# Altium PCB Stepper.PcbDoc
Units mil, origin at the board's own origin, x right, y up, seen from the top; angles counter-clockwise.
Board outline 1800 x 1900 mil, 2 copper layers (Top, Bottom); 42 components, 36 nets, 141 pads, 123 vias.
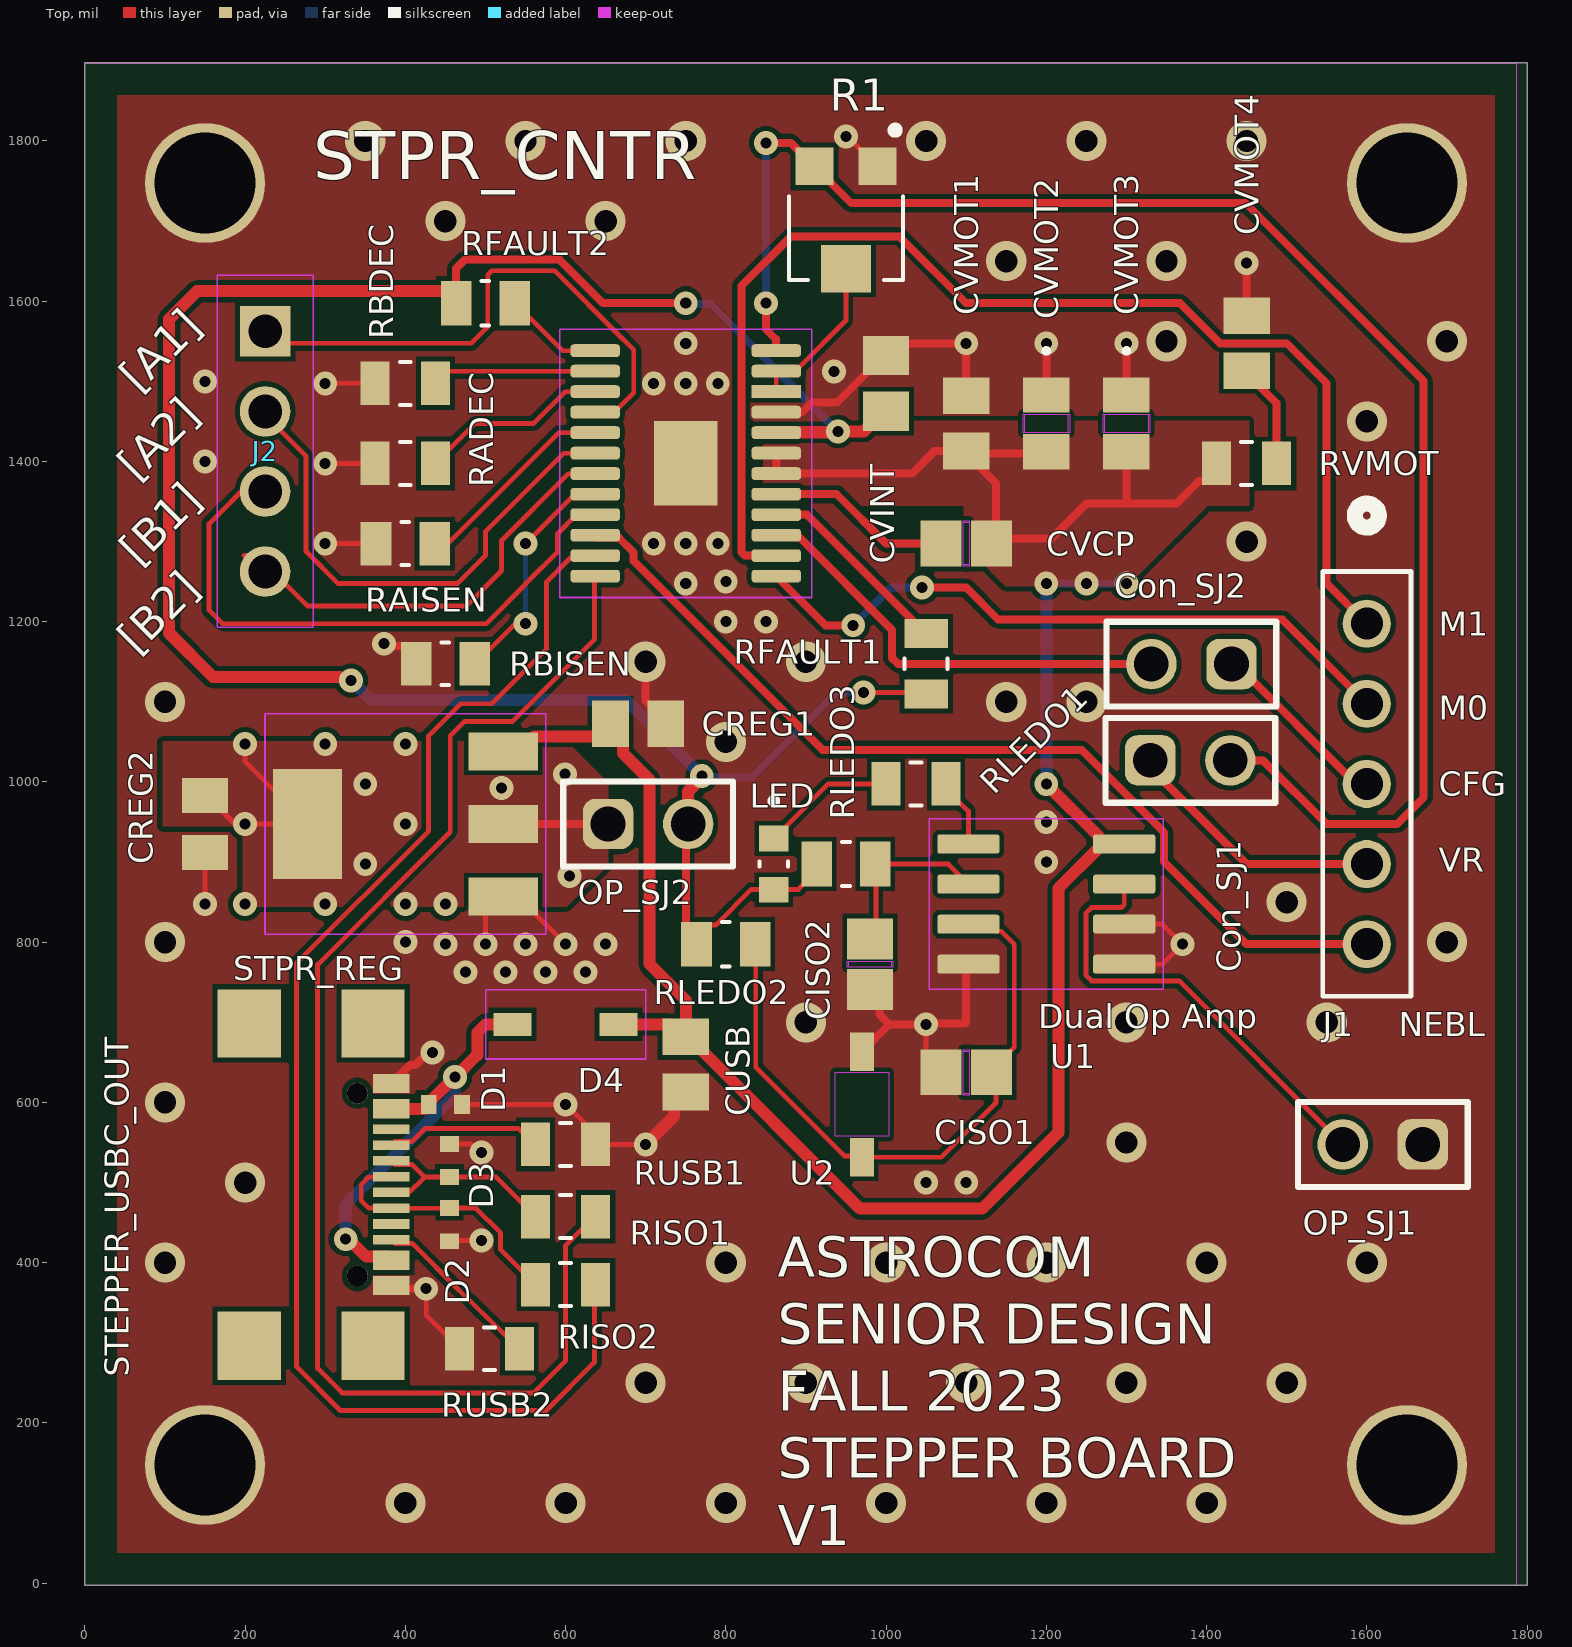
[diagram p0: Top view]
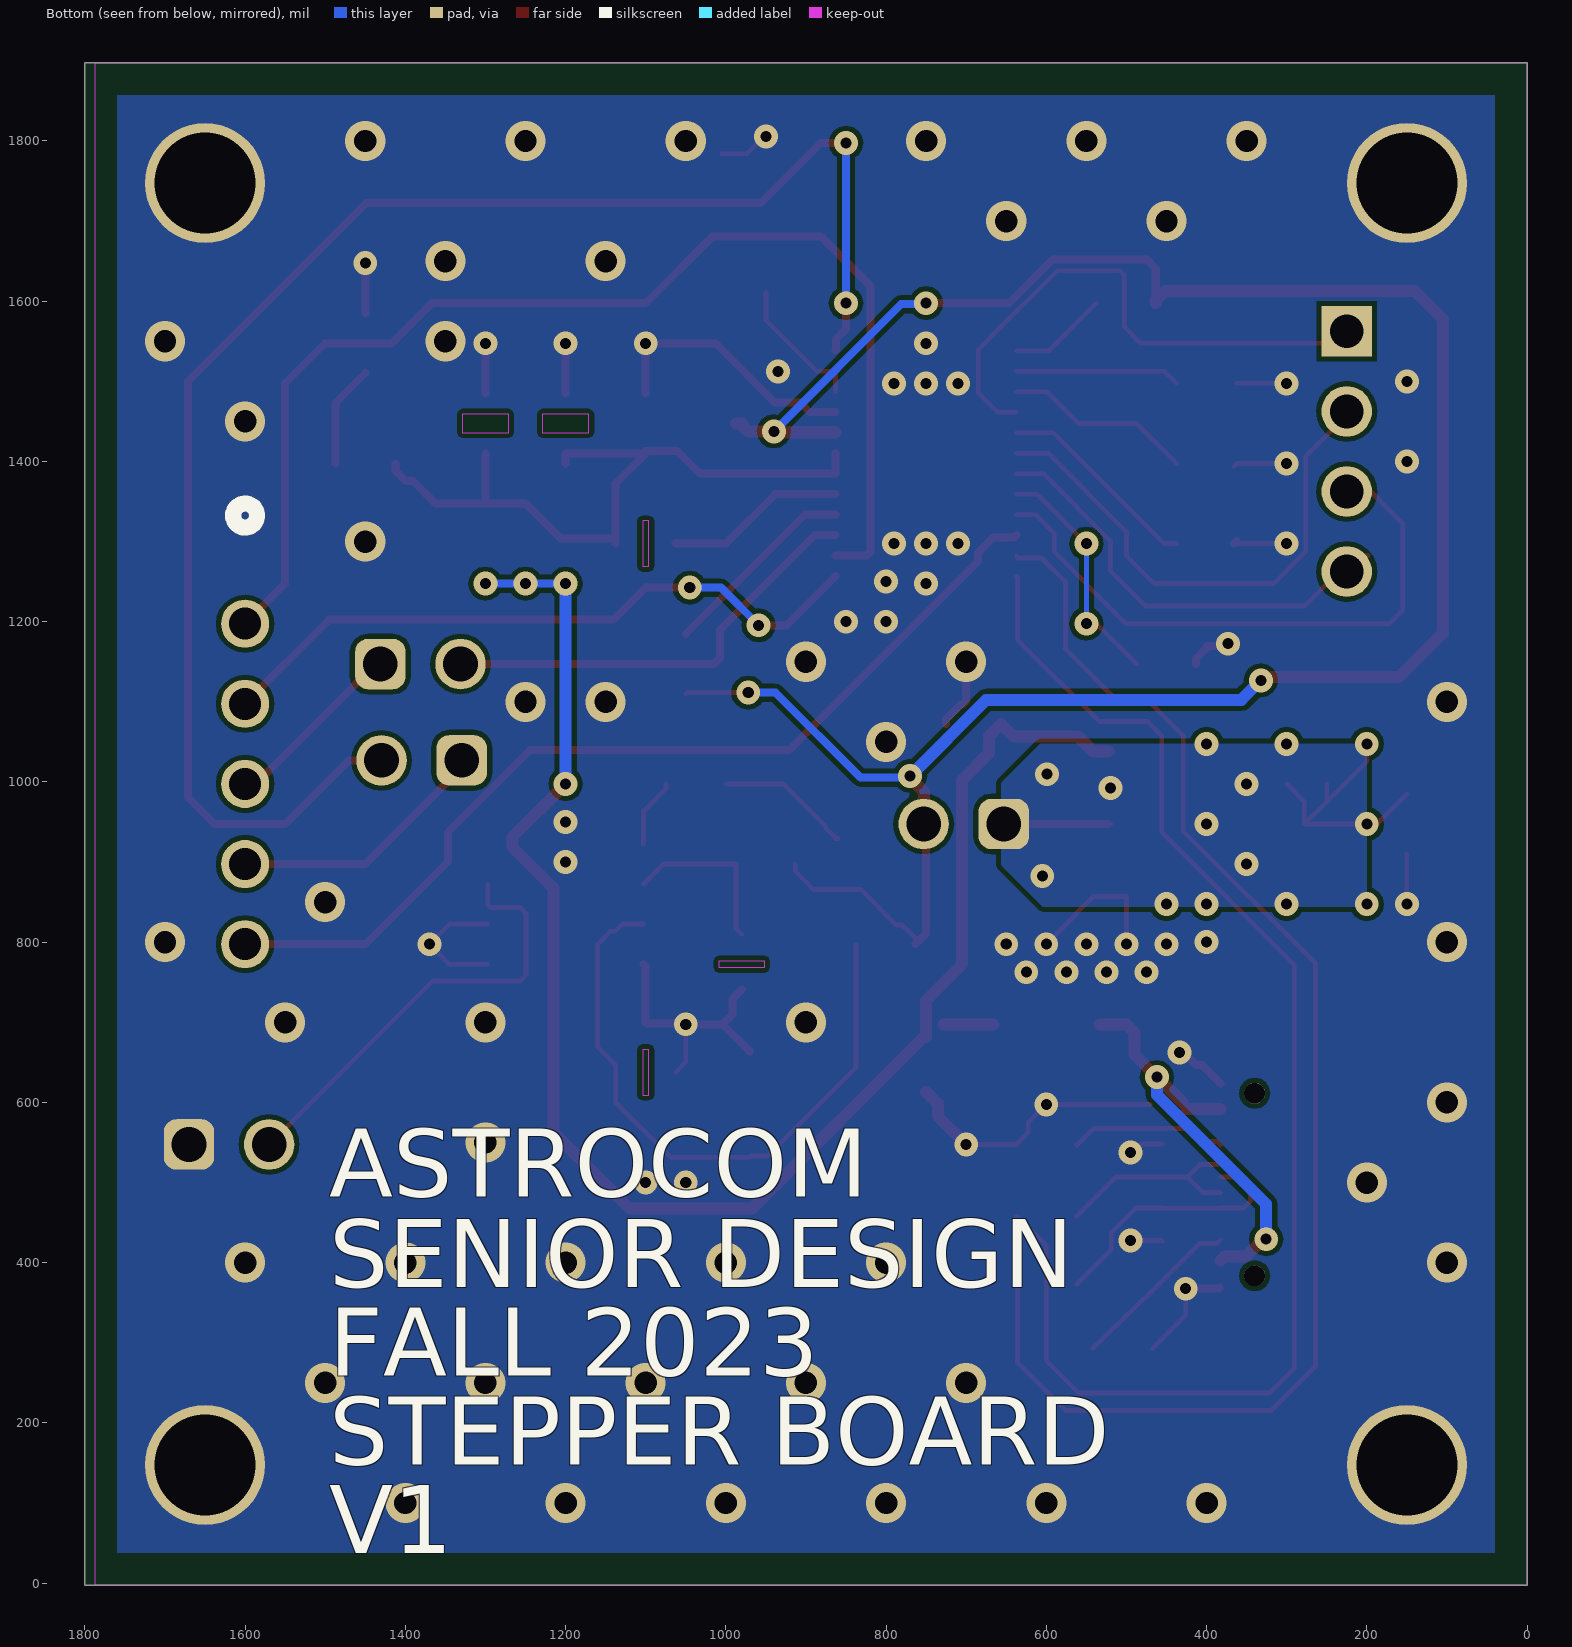
[diagram p1: Bottom view, seen from below]
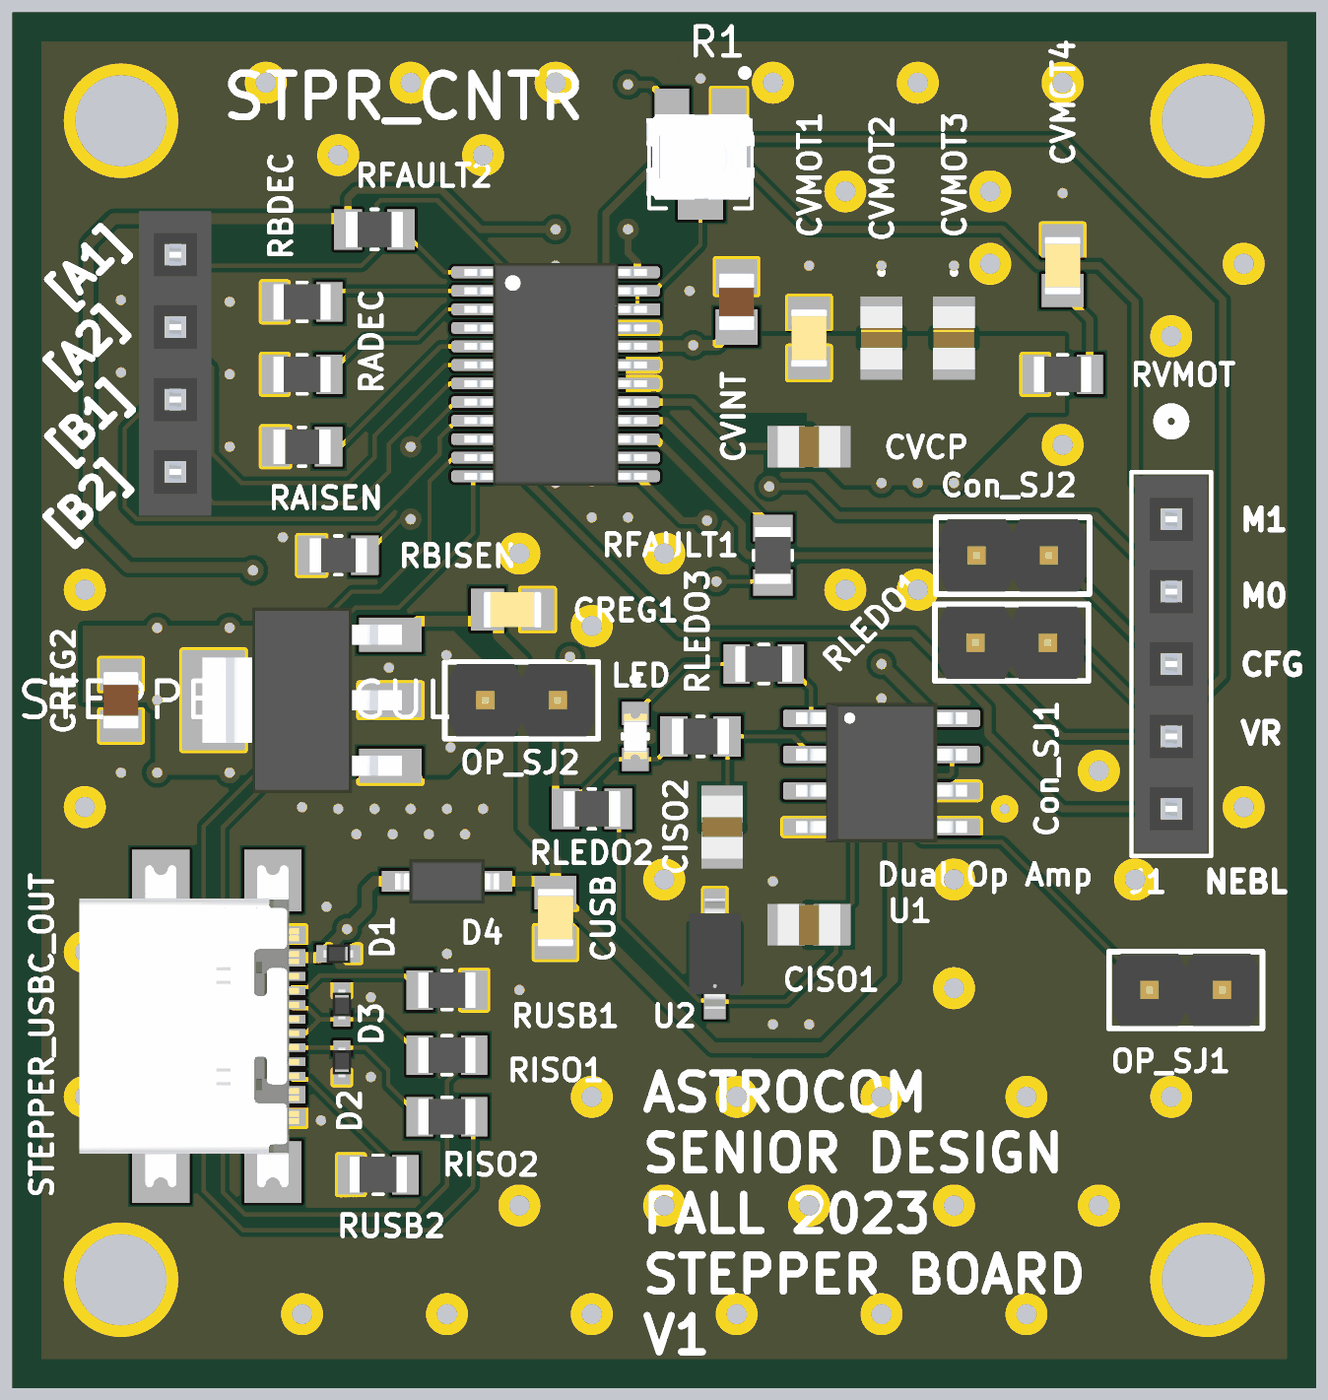
[diagram p2: 3D render of the assembled board from above, using the file's embedded part models]

## Layer stack, top to bottom
Top Solder: solder mask 0.4, Solder Resist, Dk 3.5
Top: signal copper 1.378
Dielectric 1: dielectric 12.6, FR-4, Dk 4.8
Bottom: signal copper 1.378
Bottom Solder: solder mask 0.4, Solder Resist, Dk 3.5

## Board outline
0,-2.5 1800,-2.5 1800,1897.5 0,1897.5

## Design rules (kind name [scope] priority, off if disabled: settings)
BoardOutlineClearance mdCopperDimension [All] p1: gap=10 ignorepadtopadclearanceinfootprint=FALSE except(0: Arc-SplitContinuation Track-SplitContinuation SMDPad-SplitContinuation THPad-SplitContinuation Via-SplitContinuation Fill-SplitContinuation Poly-SplitContinuation Region-SplitContinuation Text-SplitContinuation; 40: Poly-OutlineEdge Poly-CavityEdge Poly-CutoutEdge Poly-SplitBarrior)
Clearance "Clearance (Same Net)" [All] p1: gap=6 ignorepadtopadclearanceinfootprint=FALSE
Clearance [All] p2: gap=6 ignorepadtopadclearanceinfootprint=FALSE
HoleSize [All] p1: absolutevalues=TRUE maxlimit=100000 minlimit=13.78 maxpercent=80.000 minpercent=20.000
HoleToHoleClearance mdDrill [All] p1: gap=6 allowstackedmicrovias=TRUE
MinimumSolderMaskSliver [All] p1 off: minsoldermaskwidth=10
PasteMaskExpansion Expansion_SMDPaste_OFF [InPadClass('SMDPaste_OFF')] p1: expansion=0
PasteMaskExpansion mlMinCreamFrame [All] p2: expansion=0
PolygonConnect PolygonConnect_For_PolygonThermal_ON_Width60000_Gap100000 [InPolygonClass('PolygonThermal_ON_Width60000_Gap100000') vs Not IsVia] p1: connectstyle=Relief reliefconductorwidth=6 reliefentries=4 polygonreliefangle="90 Angle" airgapwidth=10
PolygonConnect PolygonConnect_For_PolygonThermal_OFF [InPolygonClass('PolygonThermal_OFF')] p2: connectstyle=Direct reliefconductorwidth=10 reliefentries=4 polygonreliefangle="90 Angle" airgapwidth=10
PolygonConnect ThermalVias [IsVia] p3: connectstyle=Direct reliefconductorwidth=10 reliefentries=4 polygonreliefangle="90 Angle" airgapwidth=10
PolygonConnect [All] p4: connectstyle=Direct reliefconductorwidth=10 reliefentries=4 polygonreliefangle="90 Angle" airgapwidth=10
RoutingVias [All] p1: holewidth=13.78 width=29.78 viastyle="Through Hole" minholewidth=13.78 minwidth=29.78 maxholewidth=100 maxwidth=100
SolderMaskExpansion Expansion_SMDSolder_OFF [InPadClass('SMDSolder_OFF')] p1: expansion=0 istentingtop=FALSE
SolderMaskExpansion mlMinStopFrame [All] p2: expansion=4 istentingtop=FALSE
Width [All] p1: maxlimit=30 minlimit=6 preferedwidth=10 minimp=50.000000 maximp=50.000000 favimp=50.000000
26 further rules are at their usual default settings.

## Classes and differential pairs
polygon class PolygonThermal_OFF: Polygon_1_Net_5VOUTUSB2
pad class SMDPaste_OFF: STEPPER_CONTROLLER-25

## Components (designator, comment, footprint, x,y, rotation, side; value= is the part's Value field where it differs from the comment)
CISO1 "0.01uF" CAPC220145_88N_KEM 1100,637.5 r180 top
CISO2 "0.01uF" CAPC220145_88N_KEM 980,772.5 r270 top
Con_SJ1 "61300211121" 61300211121 1379.73,1026.9 r0 top
Con_SJ2 "61300211121" 61300211121 1381.15,1147.15 r180 top
CREG1 "10uF" CAPC2012X88N 690.55,1072.5 r0 top
CREG2 "22uF" CAPC2012X145N 150,947.5 r270 top
CUSB "10uF" CAPC2012X88N 750,647.5 r270 top
CVCP "0.01uF" CAPC220145_88N_KEM 1100,1297.5 r180 top
CVINT "4.7uF" CAPC2012X140N 1000,1497.5 r90 top
CVMOT1 "10uF" CAPC2012X88N 1100,1447.5 r270 top
CVMOT2 "0.1uF" CAP_KGM21_KAV 1200,1447.5 r270 top
CVMOT3 "0.1uF" CAP_KGM21_KAV 1300,1447.5 r270 top
CVMOT4 "10uF" CAPC2012X88N 1450,1547.5 r270 top
D1 "Protection Diode CPDQ5V0" MBTB-D-SOD-923F-IMP-0402 450,597.5 r180 top
D2 "Protection Diode CPDQ5V0" MBTB-D-SOD-923F-IMP-0402 455,447.5 r90 top
D3 "Protection Diode CPDQ5V0" MBTB-D-SOD-923F-IMP-0402 455,527.5 r270 top
D4 "SCHOTTKY DIODE" SOD3715X145N 600,697.5 r180 top
J1 "5P Female Headers" CONN5_1LFBN-RC_SUL 1600,1197.5 r270 top
J2 "4P Female Headers" SULLINS_PPTC041LFBN-RC 225,1412.5 r270 top
LED "Green LED" LEDC1608X35N 860,897.5 r270 top
OP_SJ1 "61300211121" 61300211121 1620,547.5 r180 top
OP_SJ2 "61300211121" 61300211121 703,947.5 r0 top
R1 "10k Ohm Potentiometer" TRIM_TC33X-2-103E 950,1697.5 r270 top
RADEC "47k Ohm" RESC2012X60N#1 400,1397.5 r180 top (schematic designator RADECAY)
RAISEN "0.1 Ohm" RESC2012X60N#2 400,1297.5 r180 top
RBDEC "47k Ohm" RESC2012X60N#1 400,1497.5 r180 top (schematic designator RBDECAY)
RBISEN "0.1 Ohm" RESC2012X60N#2 450,1147.5 r180 top
RFAULT1 "1.5k Ohm" RESC2012X60N#1 1050,1147.5 r270 top
RFAULT2 "10k Ohm" RESC2012X55N 500,1597.5 r0 top
RISO1 "1.5k Ohm" RESC2012X60N#1 600,457.5 r180 top
RISO2 "1.5k Ohm" RESC2012X60N#1 600,372.5 r180 top
RLEDO1 "2.2k Ohm" RESC2012X60N#1 1037.4,997.5 r0 top (schematic designator RLEDOUT1)
RLEDO2 "10k Ohm" RESC2012X55N 800,797.5 r180 top (schematic designator RLEDOUT2)
RLEDO3 "10k Ohm" RESC2012X55N 950,897.5 r180 top (schematic designator RLEDOUT3)
RUSB1 "5.1k Ohm" RESC2012X60N#1 600,547.5 r0 top
RUSB2 "5.1k Ohm" RESC2012X60N#1 505,292.5 r180 top
RVMOT "1 Ohm" RESC2012X60N#1 1450,1397.5 r180 top
STEPPER_USBC_OUT "USBC Connector" USB4110-GF-A_GCT 250,497.5 r270 top
STPR_CNTR "MTR DVR" SOP65P640X120-25N 750,1397.5 r0 top (schematic designator STEPPER_CONTROLLER)
STPR_REG "DIODES AZ1117I" SOT230P700X185-4N 400,947.5 r180 top (schematic designator STEPPER_REGULATOR)
U1 "Dual Op Amp" SOIC127P599X175-8N 1200,847.5 r0 top
U2 "Zenner Diode" SOD-123_ONS 970,597.5 r90 top

## Footprints (in the part's own frame and the unit in brackets; to place one, negate y for a bottom-side part, rotate by r counter-clockwise, add the part's x,y. Pads: shape width x height; smd on the part's side, far side on the other; paste and mask are expansions set on the pad)
61300211121 [mm] "Pin Header, pitch 2.54 mm, THT, Vertical, single row, 2p"
  rrect50% 1.6x1.6 hole 1.1: 1(-1.27,0)
  round 1.6 hole 1.1: 2(1.27,0)
  silkscreen extent -2.69,-1.35 2.69,1.35, body extent -2.54,-1.27 2.54,1.27, height 8.57
CAP_KGM21_KAV [mil]
  rect 44x58 smd paste+0 mask+0: 1(-35.5,0) 2(35.5,0)
  Top keep-out region: -11.5,-27 -11.5,27 11.5,27 11.5,-27
  Keep-Out Layer region: -11.5,-29 -11.5,29 11.5,29 11.5,-29
  silkscreen extent -93,-3 -88,3, body extent -44,-29 44,29, height 37
CAPC2012X88N [mm]
  rect 1.16x1.47 smd: 1(-0.875,0) 2(0.875,0)
  body extent -1.02,-0.64 1.02,0.64, height 1.4
CAPC2012X140N [mm] "C0805"
  rect 1.24x1.47 smd: 1(-0.885,0) 2(0.885,0)
  body extent -1,-0.63 1,0.63, height 1.4
CAPC2012X145N [mm]
  rect 1.11x1.47 smd: 1(-0.9,0) 2(0.9,0)
  body extent -1,-0.63 1,0.63, height 1.45
CAPC220145_88N_KEM [mm]
  rect 1.306x1.45 smd paste+0 mask+0: 1(-0.803,0) 2(0.803,0)
  Top keep-out region: -0.099,-0.674 -0.099,0.674 0.099,0.674 0.099,-0.674
  Keep-Out Layer region: -0.099,-0.725 -0.099,0.725 0.099,0.725 0.099,-0.725
  body extent -1.1,-0.72 1.1,0.72, height 0.88
CONN5_1LFBN-RC_SUL [mil]
  round 60 hole 40 paste-99999 mask+0: 1(0,0) 2(100,0) 3(200,0) 4(300,0) 5(400,0)
  silkscreen extent -150,-55 465,55, body extent -60,-50 460,50, height 335
LEDC1608X35N [mm]
  rect 0.81x0.93 smd: A(0.81,0) C(-0.81,0)
  silkscreen extent -2.1,-0.45 0.09,0.45, body extent -0.8,-0.4 0.8,0.4, height 0.8
MBTB-D-SOD-923F-IMP-0402 [mm]
  rect 0.5x0.6 smd: 1(-0.525,0) 2(0.525,0)
  body extent -0.52,-0.33 0.52,0.33, height 0.82
RESC2012X55N [mm]
  rect 0.97x1.42 smd: 1(-0.93,0) 2(0.93,0)
  silkscreen extent -0.12,-0.7 0.12,0.7, body extent -1,-0.63 1,0.63, height 0.55
RESC2012X60N#1 [mm]
  rect 0.92x1.38 smd: 1(-0.955,0) 2(0.955,0)
  silkscreen extent -0.17,-0.68 0.17,0.68, body extent -1,-0.63 1,0.63, height 0.6
RESC2012X60N#2 [mm]
  rect 0.97x1.38 smd: 1(-0.93,0) 2(0.93,0)
  silkscreen extent -0.12,-0.68 0.12,0.68, body extent -1,-0.6 1,0.6, height 0.6
SOD3715X145N [mm]
  rect 1.21x0.73 smd: A(1.68,0) C(-1.68,0)
  Top keep-out lines w0.05: 2.535,1.1 2.535,-1.1 -2.535,-1.1 -2.535,1.1 2.535,1.1
  body extent -1.83,-0.77 1.83,0.77, height 1.51
SOD-123_ONS [mil]
  rect 48x30 smd: 1(-66,0) 2(66,0)
  Top keep-out region: -40,33.5 40,33.5 40,-33.5 -40,-33.5
  body extent -76,-36 76,36, height 53
SOIC127P599X175-8N [mil]
  rrect25% 77.56x23.62 smd: 1(-97.24,75) 2(-97.24,25) 3(-97.24,-25) 4(-97.24,-75) 5(97.24,-75) 6(97.24,-25) 7(97.24,25) 8(97.24,75)
  Top keep-out lines w1.97: -145.87,-106.4 145.87,-106.4 145.87,106.4 -145.87,106.4 -145.87,-106.4
  body extent -118,-96 118,96, height 69
SOP65P640X120-25N [mil]
  rrect54% 61.81x16.14 smd: 1(-112.99,140.75) 2(-112.99,115.16) 3(-112.99,89.57) 4(-112.99,63.98) 5(-112.99,38.39) 6(-112.99,12.8) 7(-112.99,-12.8) 8(-112.99,-38.39) 9(-112.99,-63.98) 10(-112.99,-89.57) 11(-112.99,-115.16) 12(-112.99,-140.75) 13(112.99,-140.75) 14(112.99,-115.16) 15(112.99,-89.57) 16(112.99,-63.98) 17(112.99,-38.39) 18(112.99,-12.8) 19(112.99,12.8) 20(112.99,38.39) 21(112.99,63.98) 23(112.99,115.16) 24(112.99,140.75)
  rect 61.81x16.14 smd: 22(112.99,89.57)
  rect 79.72x105.51 smd paste+0: 25(0,0)
  Top keep-out lines w1.97: -157.48,-167.32 157.48,-167.32 157.48,167.32 -157.48,167.32 -157.48,-167.32
  body extent -126,-154 126,154, height 47
SOT230P700X185-4N [mil]
  rect 86.61x47.24 smd: 1(-122.05,90.55) 2(-122.05,0) 3(-122.05,-90.55)
  rect 86.61x137.8 smd: 4(122.05,0)
  Top keep-out lines w1.97: 175.2,137.8 -175.2,137.8 -175.2,-137.8 175.2,-137.8 175.2,137.8
  body extent -138,-128 138,128, height 65
SULLINS_PPTC041LFBN-RC [mil]
  rect 63.2x63.2 / inner round 58.38 / far side rect 63.2x63.2 hole 42.13: 1(-150,0)
  round 63.2 hole 42.13: 2(-50,0) 3(50,0) 4(150,0)
  Top keep-out lines w1.97: 219.69,-59.84 -219.69,-59.84 -219.69,59.84 219.69,59.84 219.69,-59.84
  body extent -210,-50 210,50, height 335
TRIM_TC33X-2-103E [mm]
  rect 1.2x1.2 smd: 1(-1.8,1) 3(-1.8,-1)
  rect 1.5x1.6 smd: 2(1.45,0)
  silkscreen extent -3.07,-1.8 1.8,1.8, body extent -1.5,-1.9 1.5,1.9, height 1.1
USB4110-GF-A_GCT [mil]
  round 26 hole 26: 13(-114,90) 14(114,90)
  rect 85x79 smd: 15(-201.18,109.76) 16(201.18,109.76) 17(-201.18,-44.97) 18(201.18,-44.97)
  rect 24x45 smd: A1-B12(-125.98,132.39) A4-B9(-94.49,132.39) A9-B4(94.49,132.39) A12-B1(125.98,132.39)
  rect 12x45 smd: A5(-49.21,132.39) A6(-9.84,132.39) A7(9.84,132.39) A8(49.21,132.39) B5(68.9,132.39) B6(29.53,132.39) B7(-29.53,132.39) B8(-68.9,132.39)
  body extent -222,-157 222,146, height 128

## Part data
CISO1 CISO2 CVCP: library part C0805C103K1RAC7210, "CAP CER SMD 0805 .01UF 100V X7R", MFR_NAME=Kemet, COPYRIGHT="Copyright (C) 2023 Ultra Librarian. All rights reserved.", MANUFACTURER_PART_NUMBER=C0805C103K1RAC7210, RefDes=RefDes, TYPE=DEV
Con_SJ1 Con_SJ2 OP_SJ1 OP_SJ2: library part CMP-1712-00002-5, "CONN HEADER VERT 2POS 2.54MM", Color=Black, Contact Resistance=20mΩ, Current Rating=3A, Max Operating Temperature=125°C, Min Operating Temperature=-40°C, Operating Supply Voltage=250V, Connector Type="Male Pin", Contact Gender=Male, Contact Material=Copper, Contact Mating Length=5.9944mm, Contact Plating=Gold, Gender=Male, Height=8.94mm, Housing Material=PBT, Lead Free="Lead Free", Lead Pitch=2.54mm, Mount="Through Hole", NexarPartId=20081794, Number of Contacts=2, Number of Pins=2, Number of Positions=2, Number of Rows=1, Orientation=Vertical, Packaging=Bulk, Pitch=2.54mm, REACH SVHC="No SVHC", RoHS=Compliant, Termination="Through Hole", Voltage Rating=250V
CREG1 CUSB CVMOT1 CVMOT4: library part C0805C106J8RACAUTO, "CAP CER 10UF 10V X7R 0805", PACKAGE="0805 KEMET", AVAILABILITY=Unavailable, MF=KEMET, MP=C0805C106J8RACAUTO, PRICE=None, SNAPEDA_LINK=https://www.snapeda.com/parts/C0805C106J8RACAUTO/KEMET/view-part/3596814/?ref=snap
CREG2: library part GRM21BR61C226ME44L, "CAP CER 22UF 16V X5R 0805", PACKAGE="2012 Murata", Arrow_Electronics-Purchase-URL=https://snapeda.com/shop?store=Arrow+Electronics&id=4387753, Digi-Key_Part_Number=490-10747-1-ND, DigiKey-Purchase-URL=https://snapeda.com/shop?store=DigiKey&id=4387753, MF=Murata, Mouser-Purchase-URL=https://snapeda.com/shop?store=Mouser&id=4387753, MP=GRM21BR61C226ME44L, SNAPEDA_LINK=https://www.snapeda.com/parts/GRM21BR61C226ME44L/Murata/view-part/4387753/?ref=snap
CVINT: library part C0805C475M4RACAUTO, "CAP CER 4.7UF 16V X7R 0805", PACKAGE=None, AVAILABILITY=Unavailable, MP=C0805C475M4RACAUTO, PRICE=None
CVMOT2 CVMOT3: library part KGM21NR71H104JT, "CAP CER 0.1UF 50V X7R 0805", MFR_NAME="KYOCERA AVX", COPYRIGHT="Copyright (C) 2023 Ultra Librarian. All rights reserved.", MANUFACTURER_PART_NUMBER=KGM21NR71H104JT, RefDes=RefDes, TYPE=DEV
D1 D2 D3: library part CPDQ5V0-HF, "TVS DIODE 5VWM 18.6V 0402/SOD923", PACKAGE="0402 Comchip", AVAILABILITY="In Stock", CHECK_PRICES=https://www.snapeda.com/parts/CPDQ5V0-HF/Comchip+Technology/view-part/?ref=eda, DeviceSetName=CPDQ5V0-HF, GateName_1=G$1, LibraryName=CPDQ5V0-HF, MF="Comchip Technology", MP=CPDQ5V0-HF, PRICE=None, PURCHASE-URL="https://www.snapeda.com/api/url_track_click_mouser/?unipart_id=809934&manufacturer=Comchip Technology&part_name=CPDQ5V0-HF&search_term=cpdq5v0-hf", SNAPEDA_LINK=https://www.snapeda.com/parts/CPDQ5V0-HF/Comchip+Technology/view-part/?ref=snap, SymbolName_1=CPDQ5V0-HF
D4: library part 1N5819HW-7-F, "DIODE SCHOTTKY 40V 1A SOD123", PACKAGE="SOD-123 Fairchild Semiconductor", AVAILABILITY="In Stock", CHECK_PRICES=https://www.snapeda.com/parts/1N5819HW-7-F/Diodes+Inc./view-part/?ref=eda, DeviceSetName=1N5819HW-7-F, GateName_1=G$1, LibraryName=1N5819HW-7-F, MF="Diodes Inc.", MP=1N5819HW-7-F, PRICE=None, PURCHASE-URL="https://www.snapeda.com/api/url_track_click_mouser/?unipart_id=42272&manufacturer=Diodes Inc.&part_name=1N5819HW-7-F&search_term=1n5819hw-7-f", SNAPEDA_LINK=https://www.snapeda.com/parts/1N5819HW-7-F/Diodes+Inc./view-part/?ref=snap, SymbolName_1=1N5819HW-7-F
J1: library part PPTC051LFBN-RC, "CONN HDR 5POS 0.1 TIN PCB", MFR_NAME=Sullins, COPYRIGHT="Copyright (C) 2023 Ultra Librarian. All rights reserved.", MANUFACTURER_PART_NUMBER=PPTC051LFBN-RC, RefDes=RefDes, TYPE=DEV
J2: library part PPTC041LFBN-RC, "CONN HDR 4POS 0.1 TIN PCB", PACKAGE=SULLINS_PPTC041LFBN-RC, AVAILABILITY="In Stock", CHECK_PRICES=https://www.snapeda.com/parts/PPTC041LFBN-RC/Sullins+Connector+Solutions/view-part/?ref=eda, DeviceSetName=PPTC041LFBN-RC, GateName_1=G$1, LibraryName=PPTC041LFBN-RC, MF="Sullins Connector", MP=PPTC041LFBN-RC, PRICE=None, PURCHASE-URL="https://www.snapeda.com/api/url_track_click_mouser/?unipart_id=285917&manufacturer=Sullins Connector&part_name=PPTC041LFBN-RC&search_term=pptc041lfbn-rc", SNAPEDA_LINK=https://www.snapeda.com/parts/PPTC041LFBN-RC/Sullins+Connector+Solutions/view-part/?ref=snap, SymbolName_1=PPTC041LFBN-RC
LED: library part LTST-C190GKT, "LED GREEN CLEAR CHIP SMD", PACKAGE="0603 Lite-On", CHECK_PRICES=https://www.snapeda.com/parts/LTST-C190GKT/Lite-On+Inc./view-part/?ref=eda, MF="Lite-On Inc.", MP=LTST-C190GKT, SNAPEDA_LINK=https://www.snapeda.com/parts/LTST-C190GKT/Lite-On+Inc./view-part/?ref=snap
R1: library part TC33X-2-103E, "TRIMMER 10K OHM 0.1W J LEAD TOP", PACKAGE="SOD-23 Bourns", CHECK_PRICES=https://www.snapeda.com/parts/TC33X-2-103E/Bourns/view-part/47092/?ref=eda, Digi-Key_Part_Number=TC33X-103ECT-ND, MF=Bourns, MP=TC33X-2-103E, PURCHASE-URL=https://pricing.snapeda.com/search/part/TC33X-2-103E/?ref=eda, SNAPEDA_LINK=https://www.snapeda.com/parts/TC33X-2-103E/Bourns/view-part/47092/?ref=snap
RADEC RBDEC: library part RC0805FR-1047KL, "RES 47K OHM 1% 1/8W 0805", PACKAGE=None, AVAILABILITY=Unavailable, MP=RC0805FR-1047KL, PRICE=None
RAISEN RBISEN: library part CRM0805AFX-R100ELF, "RES 0.1 OHM 1% 1/4W 0805", PACKAGE=None, AVAILABILITY=Unavailable, MP=CRM0805AFX-R100ELF, PRICE=None
RFAULT1 RISO1 RISO2: library part AC0805JR-071K5L, "RES SMD 1.5K OHM 5% 1/8W 0805", PACKAGE=None, AVAILABILITY=Unavailable, MP=AC0805JR-071K5L, PRICE=None
RFAULT2 RLEDO2 RLEDO3: library part TNPW080510K0FEEA, "RES 10K OHM 1% 1/8W 0805", PACKAGE=None, AVAILABILITY=Unavailable, MP=TNPW080510K0FEEA, PRICE=None
RLEDO1: library part AC0805FR-072K2L, "RES SMD 2.2K OHM 1% 1/8W 0805", PACKAGE=None, AVAILABILITY=Unavailable, MP=AC0805FR-072K2L, PRICE=None
RUSB1 RUSB2: library part RC0805JR-075K1L, "RES 5.1K OHM 5% 1/8W 0805", PACKAGE=None, AVAILABILITY=Unavailable, MP=RC0805JR-075K1L, PRICE=None
RVMOT: library part RC0805JR-071RL, "RES 1 OHM 5% 1/8W 0805", PACKAGE="2012 Rohm Semiconductor", CHECK_PRICES=https://www.snapeda.com/parts/RC0805JR-071RL/Yageo/view-part/615240/?ref=eda, Digi-Key_Part_Number=311-1.0ARCT-ND, MF=Yageo, MP=RC0805JR-071RL, PURCHASE-URL=https://pricing.snapeda.com/search/part/RC0805JR-071RL/?ref=eda, SNAPEDA_LINK=https://www.snapeda.com/parts/RC0805JR-071RL/Yageo/view-part/615240/?ref=snap
STEPPER_USBC_OUT: library part USB4110-GF-A, "CONN RCP USB2.0 TYP C 24P SMD RA", MFR_NAME="Global Connector Technology", COPYRIGHT="Copyright (C) 2023 Ultra Librarian. All rights reserved.", DeviceSetName=USB4110-GF-A, GateName_1=A, LibraryName=USB4110-GF-A, MANUFACTURER_PART_NUMBER=USB4110-GF-A, SymbolName_1=USB4110-GF-A
STPR_CNTR: library part DRV8834PWP, "IC MOTOR DRIVER BIPOLAR 24HTSSOP", PACKAGE="HTSSOP-24 Texas Instruments", AVAILABILITY="In Stock", DeviceSetName=DRV8834PWP, GateName_1=G$1, LibraryName=DRV8834PWP, MF="Texas Instruments", MP=DRV8834PWP, PRICE=None, PURCHASE-URL=https://pricing.snapeda.com/search?q=DRV8834PWP&ref=eda, SymbolName_1=DRV8834PWP
STPR_REG: library part AZ1117IH-3.3TRG1, "IC REG LINEAR 3.3V 1A SOT223", PACKAGE="SOT-223 Diodes Inc.", AVAILABILITY="In Stock", CHECK_PRICES=https://www.snapeda.com/parts/AZ1117IH-3.3TRG1/Diodes+Inc./view-part/?ref=eda, DeviceSetName=AZ1117IH-3.3TRG1, GateName_1=G$1, LibraryName=AZ1117IH-3.3TRG1, MF="Diodes Inc.", MP=AZ1117IH-3.3TRG1, PRICE=None, PURCHASE-URL="https://www.snapeda.com/api/url_track_click_mouser/?unipart_id=490259&manufacturer=Diodes Inc.&part_name=AZ1117IH-3.3TRG1&search_term=az1117ih-3.3trg1", SNAPEDA_LINK=https://www.snapeda.com/parts/AZ1117IH-3.3TRG1/Diodes+Inc./view-part/?ref=snap, SymbolName_1=AZ1117IH-3.3TRG1
U1: library part LM358DR, "IC OPAMP GP 2 CIRCUIT 8SOIC", PACKAGE="SOIC-8 Texas Instruments", AVAILABILITY="In Stock", CHECK_PRICES=https://www.snapeda.com/parts/LM358DR/Texas+Instruments/view-part/?ref=eda, DeviceSetName=LM358DR, GateName_1=A, LibraryName=LM358DR, MF="Texas Instruments", MP=LM358DR, PRICE=None, PURCHASE-URL="https://www.snapeda.com/api/url_track_click_mouser/?unipart_id=6639&manufacturer=Texas Instruments&part_name=LM358DR&search_term=lm358dr", SNAPEDA_LINK=https://www.snapeda.com/parts/LM358DR/Texas+Instruments/view-part/?ref=snap, SymbolName_1=LM358DR
U2: library part MMSZ5225BT1G, "DIODE ZENER 3V 500MW SOD123", MFR_NAME=onsemi, COPYRIGHT="Copyright (C) 2023 Ultra Librarian. All rights reserved.", DeviceSetName=MMSZ5225BT1G, GateName_1=A, LibraryName=MMSZ5225BT1G, MANUFACTURER_PART_NUMBER=MMSZ5225BT1G, SymbolName_1=MMSZ5225BT1G

## Free pads (board coordinates)
  round 150 hole 126 unplated: MH1(1650,147.5) MH2(150,1747.5) MH3(1650,1747.5) MH4(150,147.5)

## Via types
v1: diameter 29.78/29.78 (per signal layer), hole 13.78, Top to Bottom, 77 vias
v2: diameter 50, hole 28, Top to Bottom, 46 vias

## Nets (pads, with @x,y where several pads share a name; then routed paths per layer and width w, separated by ;. In a path a pad name is that pad's centre, name@x,y a point inside that pad or via, vN(x,y) a via of type N, cw(c..) or ccw(c..) an arc to the next point about the centre after c; other vN are vias at no path point)
3.3VOUTUSB2: CVINT.1 LED.A OP_SJ2.2 RFAULT1.2 RFAULT2.1 RLEDO2.2 RLEDO3.2 STPR_CNTR.20 | length 3005.9
  Top w6: RLEDO2.2 763.39,805.29 779.48,821.39 787.27,821.39 831.79,865.91 890.65,865.91 913.39,888.64 RLEDO3.2 ; v1(972,1111.5) 1048.6,1111.5 RFAULT1.2@1050,1110.1
  Top w10: RFAULT2.1 463.39,1640.89 474.5,1652 592.21,1652 646.71,1597.5 v1(750,1597.5) ; OP_SJ2.2@752.85,945.35 750,942.5 750,810.89 RLEDO2.2 ; v1@770,1005.19 v1(770,1007.5)
  Top w15: v1(332.21,1126.82) 329.38,1129.65 319.72,1129.65 318.67,1130.7 160.15,1130.7 105,1185.84 105,1577.5 140,1612.5 451.79,1612.5 463.39,1600.91 RFAULT2.1 ; OP_SJ2.2@752.85,945.35 752.85,988.04 v1@770,1005.19 ; STPR_CNTR.20 863.56,1436.46 938.96,1436.46 v1(940,1437.5) 972.41,1437.5 978.56,1443.65 978.56,1445.75 980.32,1447.5 CVINT.1@987.4,1447.5
  Bottom w10: v1(750,1597.5) 751.24,1596.26 781.24,1596.26 v1(940,1437.5) ; v1(770,1007.5) 772.11,1005.39 832.1,1005.39 938.21,1111.5 v1(972,1111.5)
  Bottom w15: v1(332.21,1126.82) 356.53,1102.5 675,1102.5 v1(770,1007.5)
5VOUTUSB2: CREG1.1 CUSB.1 CVCP.1 CVMOT1.2 CVMOT2.2 CVMOT3.2 D4.C RVMOT.2 STPR_CNTR.18 STPR_CNTR.19 STPR_REG.3 U1.8 | length 2968
  Top w6: CVCP.1@1137.4,1297.5 CVCP.1@1143.7,1303.8
  Top w10: STPR_CNTR.19 STPR_CNTR.18 1032.2,1384.7 1060.55,1413.05 CVMOT1.2 ; CVCP.1@1137.4,1297.5 1137.4,1372.7 1100,1410.1 1200,1410.1 CVMOT2.2@1200,1397.5 ; CVCP.1@1143.7,1303.8 1206.3,1303.8 1250,1347.5 1300,1347.5 ; 1149,496.5 1150,497.5 ; CVMOT3.2@1300,1410.1 1300,1347.5 ; RVMOT.2 1412.4,1388.44 1399.29,1375.33 1390.24,1375.33 1362.4,1347.5 1300,1347.5
  Top w15: STPR_REG.3 541.73,1038.05 560.46,1056.77 640.77,1056.77 656.1,1072.11 CREG1.1 671.44,1057.17 671.44,1036.06 705,1002.5 705,772.5 750,727.5 CUSB.1 ; D4.C CUSB.1@728.56,697.5 ; CUSB.1@750,684.9 967.34,467.56 1019.99,467.56 1020.05,467.5 1120,467.5 1149,496.5 ; 1150,497.5 1215,562.5 1215,867.23 1266.36,918.59 1265.96,918.98 1265.96,931.54 v1(1200,997.5)
  Bottom w10: v1(1200,1247.5) v1(1250,1247.5) v1(1300,1247.5)
  Bottom w15: v1(1200,997.5) v1(1200,1247.5)
DN: D3.2 RISO1.2 STEPPER_USBC_OUT.A7 STEPPER_USBC_OUT.B7 | length 258.7
  Top w6: STEPPER_USBC_OUT.A7 404.96,487.66 424.13,506.83 ; STEPPER_USBC_OUT.B7 387.08,522.34 408.62,522.34 424.13,506.83 ; RISO1.2@562.6,457.5 513.27,506.83 D3.2 424.13,506.83
DP: D2.2 RISO2.2 STEPPER_USBC_OUT.A6 STEPPER_USBC_OUT.B6 | length 335.1
  Top w6: STEPPER_USBC_OUT.A6 381.95,506.9 354.4,506.9 345,497.5 345,477.5 354.4,468.1 382.26,468.1 STEPPER_USBC_OUT.B6 454.8,467.97 D2.2 488.12,468.17 518.89,437.4 518.89,416.21 RISO2.2@562.6,372.5
GND: CISO1.2 CISO2.2 CREG1.2 CREG2.2 CUSB.2 CVINT.2 CVMOT1.1 CVMOT2.1 CVMOT3.1 CVMOT4.1 D1.1 D2.1 D3.1 OP_SJ1.1 pad.MH1 pad.MH2 pad.MH3 pad.MH4 R1.1 RADEC.2 RAISEN.2 RBDEC.2 RBISEN.2 RUSB1.2 RUSB2.2 STEPPER_USBC_OUT.A1-B12 STEPPER_USBC_OUT.A12-B1 STPR_CNTR.21 STPR_CNTR.25 STPR_REG.1 U1.4 U1.5 U1.6 U2.2 | length 2317.5
  Top w6: v1(150,847.5) CREG2.2@150,910.1 ; v1(300,1297.5) RAISEN.2 RAISEN.2@366,1297.5 ; v1(300,1397.5) RADEC.2 362.6,1397.5 RADEC.2@366,1393.5 ; v1(300,1497.5) RBDEC.2 RBDEC.2@362.6,1497.5 ; STEPPER_USBC_OUT.A12-B1 STEPPER_USBC_OUT.A12-B1@384,367.5 ; v1(426,367.5) 426,334.1 RUSB2.2@467.6,292.5 ; D2.1 456.16,427.5 v1(495,427.5) ; D3.1 481.88,548.17 v1(495,537.5) ; D1.1 v1(600,597.5) 622.49,575.01 622.49,562.61 RUSB1.2 ; v1(500,797.5) 500,856.95 STPR_REG.1 541.73,856.95 562.36,836.33 562.36,835.14 v1(600,797.5) ; RUSB1.2@637.4,547.5 RUSB1.2 ; v1(700,547.5) RUSB1.2 ; v1(950,1805.71) 952.02,1805.71 973.63,1784.11 R1.1@1005.12,1784.11 ; v1(1050,697.5) 1050,650.1 CISO1.2@1062.6,637.5 ; U1.5 1325,772.5 1345,772.5 v1(1370,797.5) 1345,822.5 U1.6
  Top w10: RAISEN.2@362.6,1300.9 RAISEN.2@366,1297.5 ; v1(373.4,1172.5) 376.24,1169.67 399.29,1169.67 399.29,1167.91 413.39,1153.81 RBISEN.2 ; STEPPER_USBC_OUT.A1-B12 405.76,646.85 412.83,646.85 428.48,662.5 v1(433.79,662.5) ; STEPPER_USBC_OUT.A12-B1@384,367.5 v1(426,367.5) ; v2(700,1150) 700,1101.12 704.69,1096.44 707.17,1096.44 725,1078.6 CREG1.2 ; STPR_CNTR.21 895.36,1461.48 907.28,1473.39 938.49,1473.39 1012.6,1547.5 v1(1100,1547.5) CVMOT1.1@1100,1484.9 ; U2.2 1004,697.5 ; CISO2.2 991.79,729.1 991.79,709.71 1004,697.5 ; U1.4 1100,769.74 1100,700 1098.75,698.75 1051.25,698.75 v1(1050,697.5) 1004,697.5 ; CVMOT2.1@1200,1484.9 v1(1200,1547.5) ; CVMOT3.1@1300,1484.9 v1(1300,1547.5) ; CVMOT4.1@1450,1584.9 v1(1450,1647.5)
  Top w15: v1(700,547.5) 735.37,582.87 735.37,598.42 CUSB.2
  other v1: 1050,500 1100,500 475,762.5 525,762.5 575,762.5 625,762.5 450,797.5 550,797.5 650,797.5 400,800 1200,900 1200,950 800,1200 850,1200 750,1247.5 800,1250 710,1297.5 750,1297.5 790,1297.5 150,1400 710,1497.5 750,1497.5 790,1497.5 150,1500 935,1512.5 750,1547.5
  other v2: 400,100 600,100 800,100 1000,100 1200,100 1400,100 700,250 900,250 1100,250 1300,250 1500,250 100,400 800,400 1000,400 1200,400 1400,400 1600,400 200,500 1300,550 100,600 900,700 1300,700 1550,700 100,800 1700,800 1500,850 800,1050 100,1100 1150,1100 1250,1100 900,1150 1450,1300 1600,1450 1350,1550 1700,1550 1150,1650 1350,1650 450,1700 650,1700 350,1800 550,1800 750,1800 1050,1800 1250,1800 1450,1800
NetCISO1_1: CISO1.1 RLEDO2.1 U1.3 U2.1 | length 802.9
  Top w6: RLEDO2.1@837.4,797.5 837.4,643.87 948.29,532.99 968.51,532.99 U2.1 1069,531.5 1137.4,599.9 1137.4,646.14 1160,668.74 1160,797.23 1143.54,813.69 1137.88,813.69 1129.07,822.5 U1.3
NetCISO2_1: CISO2.1 RLEDO3.1 U1.2 | length 216.4
  Top w6: CISO2.1@980,809.9 987.4,817.3 987.4,897.5 1077.76,897.5 U1.2
NetCon_SJ1_1: Con_SJ1.1 J1.4 | length 329.2
  Top w10: Con_SJ1.1 1349.59,1007.04 1349.59,997.91 1450,897.5 J1.4
NetCon_SJ2_1: Con_SJ2.1 J1.3 | length 230.8
  Top w10: Con_SJ2.1 1436.97,1147.15 1586.62,997.5 J1.3
NetCon_SJ2_2: Con_SJ2.2 STPR_CNTR.15 | length 555.3
  Top w10: STPR_CNTR.15 889.38,1307.93 1007.5,1189.81 1007.5,1154.75 1013.95,1148.31 1015.11,1147.15 Con_SJ2.2
NetCREG2_1: CREG2.1 OP_SJ2.1 STPR_REG.2 STPR_REG.4 | length 487.9
  Top w6: CREG2.1@150,984.9 187.4,947.5 v1(200,947.5) STPR_REG.4 ; v1(200,1047.5) 200,1025.45 STPR_REG.4@250,975.45 ; STPR_REG.4@250,997.5 STPR_REG.4@250,975.45 ; STPR_REG.4@300,997.5 277.95,975.45 STPR_REG.4 ; STPR_REG.4@250,975.45 STPR_REG.4
  Top w10: STPR_REG.2 OP_SJ2.1
  other v1: 200,847.5 300,847.5 400,847.5 450,847.5 605,882.5 350,897.5 400,947.5 520,992.5 350,997.5 599.19,1009.66 300,1047.5 400,1047.5
NetCVCP_2: CVCP.2 STPR_CNTR.17 | length 225.1
  Top w10: STPR_CNTR.17 938.39,1359.11 1000,1297.5 CVCP.2@1062.6,1297.5
NetCVMOT4_2: CVMOT4.2 RVMOT.1 | length 128.1
  Top w10: CVMOT4.2@1450,1510.1 1487.4,1472.7 RVMOT.1@1487.4,1397.5
NetJ1_1: J1.1 STPR_CNTR.14 | length 1530.6
  Top w10: STPR_CNTR.14 824,1282.34 819.32,1287.03 819.32,1618.98 881.28,1680.94 1016.56,1680.94 1100.01,1597.5 1366.73,1597.5 1416.73,1547.5 1500,1547.5 1550,1497.5 1550,1247.5 J1.1
NetJ1_2: J1.2 STPR_CNTR.13 | length 841.9
  Top w10: STPR_CNTR.13 924.28,1195.46 v1(959,1195.5) ; v1(1045,1242.5) 1100,1242.5 1140,1202.5 1495,1202.5 J1.2
  Bottom w10: v1(959,1195.5) 1006,1242.5 v1(1045,1242.5)
NetJ1_5: J1.5 STPR_CNTR.10 | length 1202.1
  Top w10: STPR_CNTR.10 640.08,1304.86 666.47,1304.86 685,1286.33 685,1275.88 920.88,1040 1244.17,1040 1347.02,937.14 1347.02,900.42 1449.94,797.5 J1.5
NetJ2_1: J2.1 STPR_CNTR.4 | length 717.4
  Top w6: J2.1@210,1582.5 245,1547.5 482.41,1547.5 502.81,1567.9 502.81,1632.72 508.08,1638 586.41,1638 669.09,1555.32 676.91,1547.5 685,1539.4 685,1485.91 660.57,1461.48 STPR_CNTR.4
NetJ2_2: J2.2 STPR_CNTR.6 | length 684.8
  Top w6: J2.2@210,1482.5 210,1472.5 276.11,1406.39 276.11,1287.6 316.21,1247.5 465,1247.5 500,1282.5 500,1312.5 597.8,1410.3 STPR_CNTR.6
NetJ2_3: J2.3 STPR_CNTR.9 | length 745
  Top w6: J2.3@210,1377.5 155,1322.5 155,1214.47 171.97,1197.5 500.98,1197.5 550,1246.52 550,1247.5 590,1287.5 590,1310.08 613.45,1333.52 STPR_CNTR.9
NetJ2_4: J2.4 STPR_CNTR.7 | length 555.3
  Top w6: 198.4,1282.5 215,1282.5 278,1219.5 476.01,1219.5 520,1263.49 520,1301.29 603.42,1384.7 STPR_CNTR.7
NetLED_C: LED.C RLEDO1.1 | length 169.6
  Top w6: LED.C 862.36,929.39 875.31,942.33 875.31,944.7 928.11,997.5 RLEDO1.1@1000,997.5
NetOP_SJ1_2: OP_SJ1.2 U1.7 | length 563.4
  Top w6: U1.7 1297.24,846.82 1293.73,843.31 1256.46,843.31 1249.46,836.31 1249.46,758.69 1256.46,751.69 1365.81,751.69 OP_SJ1.2
NetR1_2: R1.2 STPR_CNTR.22 STPR_CNTR.23 | length 173.7
  Top w6: STPR_CNTR.22 STPR_CNTR.23 886.56,1512.66 891.63,1517.73 950,1576.1 R1.2@950,1610.89
NetRADEC_1: RADEC.1 STPR_CNTR.3 | length 236.7
  Top w6: RADEC.1@437.4,1397.5 487.4,1447.5 560,1447.5 599.57,1487.07 STPR_CNTR.3
NetRAISEN_1: RAISEN.1 STPR_CNTR.5 | length 256.9
  Top w6: RAISEN.1@437.4,1297.5 453.03,1297.5 591.42,1435.89 STPR_CNTR.5
NetRBDEC_1: RBDEC.1 STPR_CNTR.2 | length 205.9
  Top w6: RBDEC.1@437.4,1497.5 452.56,1512.66 STPR_CNTR.2
NetRBISEN_1: RBISEN.1 STPR_CNTR.8 | length 295.8
  Top w6: RBISEN.1@487.4,1147.5 537.4,1197.5 v1(550,1197.5) ; v1(550,1297.5) 611.61,1359.11 STPR_CNTR.8
  Bottom w6: v1(550,1197.5) v1(550,1297.5)
NetRFAULT1_1: RFAULT1.1 STPR_CNTR.16 | length 248.6
  Top w10: STPR_CNTR.16 901.38,1333.52 RFAULT1.1@1050,1184.9
NetRISO1_1: RISO1.1 STPR_CNTR.12 | length 1702.4
  Top w6: STPR_CNTR.12 636,1255.5 636,1177.5 534,1075.5 474,1075.5 456,1057.5 456,937.5 290.45,771.95 290.45,268.05 321,237.5 560,237.5 600,277.5 600,421.5 636,457.5 RISO1.1@637.4,457.5
NetRISO2_1: RISO2.1 STPR_CNTR.11 | length 1723.3
  Top w6: STPR_CNTR.11 636,1279.5 606,1279.5 576,1249.5 576,1165.5 508,1097.5 469.03,1097.5 429,1057.47 429,938.5 264,773.5 264,270.5 319,215.5 576,215.5 636,275.5 636,367.5 RISO2.1@637.4,372.5
NetRLEDO1_2: RLEDO1.2 U1.1 | length 86.6
  Top w6: RLEDO1.2@1074.8,997.5 1074.8,991.6 1102.76,963.63 U1.1
NetRUSB1_1: RUSB1.1 STEPPER_USBC_OUT.A5 | length 197.8
  Top w6: STEPPER_USBC_OUT.A5 387.08,551.4 408.62,551.4 424.72,567.5 541.02,567.5 561.81,546.71 RUSB1.1@562.6,547.5
NetRUSB2_1: RUSB2.1 STEPPER_USBC_OUT.B5 | length 215.7
  Top w6: STEPPER_USBC_OUT.B5 386.98,424.01 408.62,424.01 467.6,365.03 RUSB2.1@542.4,292.5
SLP: RFAULT2.2 STPR_CNTR.1 | length 124.2
  Top w6: RFAULT2.2@537.4,1597.5 596.65,1538.25 STPR_CNTR.1
VBUS22: D1.2 D4.A STEPPER_USBC_OUT.A4-B9 STEPPER_USBC_OUT.A9-B4 | length 534.1
  Top w10: STEPPER_USBC_OUT.A4-B9@380,592.5 381.88,592.5 STEPPER_USBC_OUT.A4-B9 ; D1.2 D1.2@429.33,599.47 ; v1@461.37,631.5 v1(462,631.5)
  Top w15: v1@325.55,428.15 330.68,428.15 351.31,407.51 377.89,407.51 STEPPER_USBC_OUT.A9-B4 ; STEPPER_USBC_OUT.A4-B9 D1.2@424.48,591.99 ; D1.2@429.33,599.47 v1@461.37,631.5 ; v1(462,631.5) 489.8,659.3 489.8,687.1 500.2,697.5 D4.A
  Bottom w15: v1(325.55,429.28) 325.55,473.05 462,609.5 v1(462,631.5)
VREF: Con_SJ1.2 R1.3 STPR_CNTR.24 | length 2016.4
  Top w10: v1(850,1597.5) 850,1565.05 862.41,1552.63 862.41,1538.83 STPR_CNTR.24 ; v1(850,1797.5) 881.5,1797.5 R1.3 956.62,1722.38 1448.92,1722.38 1671,1500.3 1671,980.52 1637.98,947.5 1550,947.5 1470.6,1026.9 Con_SJ1.2
  Bottom w10: v1(850,1597.5) v1(850,1797.5)
pads on no net: STEPPER_USBC_OUT.13 STEPPER_USBC_OUT.14 STEPPER_USBC_OUT.15 STEPPER_USBC_OUT.16 STEPPER_USBC_OUT.17 STEPPER_USBC_OUT.18 STEPPER_USBC_OUT.A8 STEPPER_USBC_OUT.B8

## Polygon pours and split planes (outlines as drawn)
GND on Top "TOP_GND" (solid, remove dead copper, pour order 19): 0,1897.5 1800,1897.5 1800,-2.5 0,-2.5 0,2.5
NetCREG2_1 on Top "Polygon_2_Net_3.3VREGOUT" (solid, remove dead copper, pour order 15): 653,896.26 653,998.74 601.24,1050.5 200,1050.5 150,1050.5 97,1050.5 97,944.5 197,944.5 197,844.5 601.24,844.5
5VOUTUSB2 on Top "Polygon_1_Net_5VOUTUSB2" (solid, remove dead copper, pour order 14): 1148.76,1244.5 1301.24,1244.5 1401.24,1344.5 1453,1344.5 1453,1450.5 847,1450.5 847,1344.5 1097,1344.5 1097,1296.26
GND on Bottom "BOT_GND" (solid, remove dead copper, pour order 13): 0,1897.5 1800,1897.5 1800,-2.5 0,-2.5
NetCREG2_1 on Bottom "Polygon_1_Net_3.3VREGOUT" (solid, remove dead copper, pour order 12): 200,844.5 200,1047.5 607.24,1047.5 656,998.74 656,896.26 604.24,844.5

## Keep-outs
Keep-Out Layer:
  lines w0: 0,-2.5 1787.01,-2.5 1787.01,1897.11 0,1897.11 0,-2.5

## Silkscreen, mask and mechanical layers (free items; w line width, h text height)
Top Overlay:
  text "[A1]" at 67.36,1484.66 h40 r45
  text "[A2]" at 65,1374.04 h40 r45
  text "[B1]" at 67.36,1268.12 h40 r45
  text "M1" at 1690,1182.5 h30
  text "[B2]" at 65,1157.5 h40 r45
  text "M0" at 1690,1077.5 h30
  text "CFG" at 1690,982.5 h30
  text "VR" at 1690,887.62 h30
  text "NEBL" at 1640,682.5 h30
  text "ASTROCOM" at 865,382.5 h50
  text "SENIOR DESIGN" at 865,298.75 h50
  text "FALL 2023" at 865,215 h50
  text "STEPPER BOARD" at 865,131.25 h50
  text "V1" at 865,47.5 h50
Bottom Overlay:
  text "ASTROCOM" at 1495,482.5 h85
  text "SENIOR DESIGN" at 1495,369.11 h85
  text "FALL 2023" at 1495,258.57 h85
  text "STEPPER BOARD" at 1495,148.04 h85
  text "V1" at 1495,37.5 h85
Dimension:
  lines w0: 0,-2.5 0,1897.11 1787.01,1897.11 1787.01,-2.5 0,-2.5

## Text inside footprints (layer, text, board x,y; h text height)
STEPPER_USBC_OUT: tPlace "*" at 357,746.5 h77.5 r270; Measures "0in/0mm" at 402,873.5 h38.75 r270; Measures "0.228in/5.78mm" at 727,645.5 h38.75 r270; Measures "0.457in/11.608mm" at 827,667.5 h38.75 r270; Measures "0.201in/5.11mm" at 727,544.5 h38.75 r270; Measures "0.252in/6.4mm" at 627,633.5 h38.75 r270; Measures "-0.201in/-5.11mm" at 627,768.5 h38.75 r270; Measures "-0.025in/-0.625mm" at 382,-50.5 h38.75 r270; Measures "-0.025in/-0.625mm" at 382,149.5 h38.75 r270; Measures "0.067in/1.7mm" at 361,1118.5 h38.75 r270; Measures "0.314in/7.976mm" at 238,1564.5 h38.75 r270; Measures "Bottom Row Padstyle: RX24Y45D0T" at -292,1171.5 h77.5 r270; Measures "Middle Row Padstyle: RX24Y45D0T" at -142,1171.5 h77.5 r270; Measures "Mounting Padstyle: EX26Y26D26P" at -442,1148.5 h77.5 r270; Measures "2nd Middle Row Padstyle: RX12Y45D0T" at -217,1262.5 h77.5 r270; Measures "Second Bottom Row Padstyle: EX55Y55D32P" at -367,1352.5 h77.5 r270; Measures "Independent Mtg Hole 1 Padstyle: RX85Y79D0T" at -592,1436.5 h77.5 r270; Measures "Second Mounting Padstyle: RX85Y79D0T" at -517,1284.5 h77.5 r270; Measures "Independent Mtg Hole 2 Padstyle: RX85Y79D0T" at -667,1436.5 h77.5 r270; Measures "Independent Mtg Hole 3 Padstyle: EX96Y96D96P" at -742,1459.5 h77.5 r270; Measures "Independent Mtg Hole 4 Padstyle: EX96Y96D96P" at -817,1459.5 h77.5 r270; Measures "Top Row Padstyle:RX24Y45D0T" at -67,1095.5 h77.5 r270; Measures "Alt 1 Padstyle: OX60Y90D30P" at -892,1080.5 h77.5 r270; Measures "Alt 2 Padstyle: OX90Y60D30P" at -967,1080.5 h77.5 r270; tDocu "*" at 357,746.5 h77.5 r270
U2: tPlace "*" at 995,469.5 h77.5 r90; Measures "0.028in/0.711mm" at 982,793.5 h38.75 r90; Measures "0.071in/1.803mm" at 982,873.5 h38.75 r90; Measures "Alt 2 Padstyle: OX90Y60D30P" at 1460,14.5 h77.5 r90; Measures "Alt 1 Padstyle: OX60Y90D30P" at 1385,14.5 h77.5 r90; Measures "Default Padstyle: RX48Y30D0T" at 1310,-1.5 h77.5 r90; Measures "0.112in/2.845mm" at 1150,438.5 h38.75 r90; Measures "0.152in/3.861mm" at 786,438.5 h38.75 r90; Measures "0.02in/0.508mm" at 886,383.5 h38.75 r90; tDocu "*" at 995,528.5 h77.5 r90